# EAGLE board Arduino_Leonardo-PlusPlus (EAGLE 6.4)
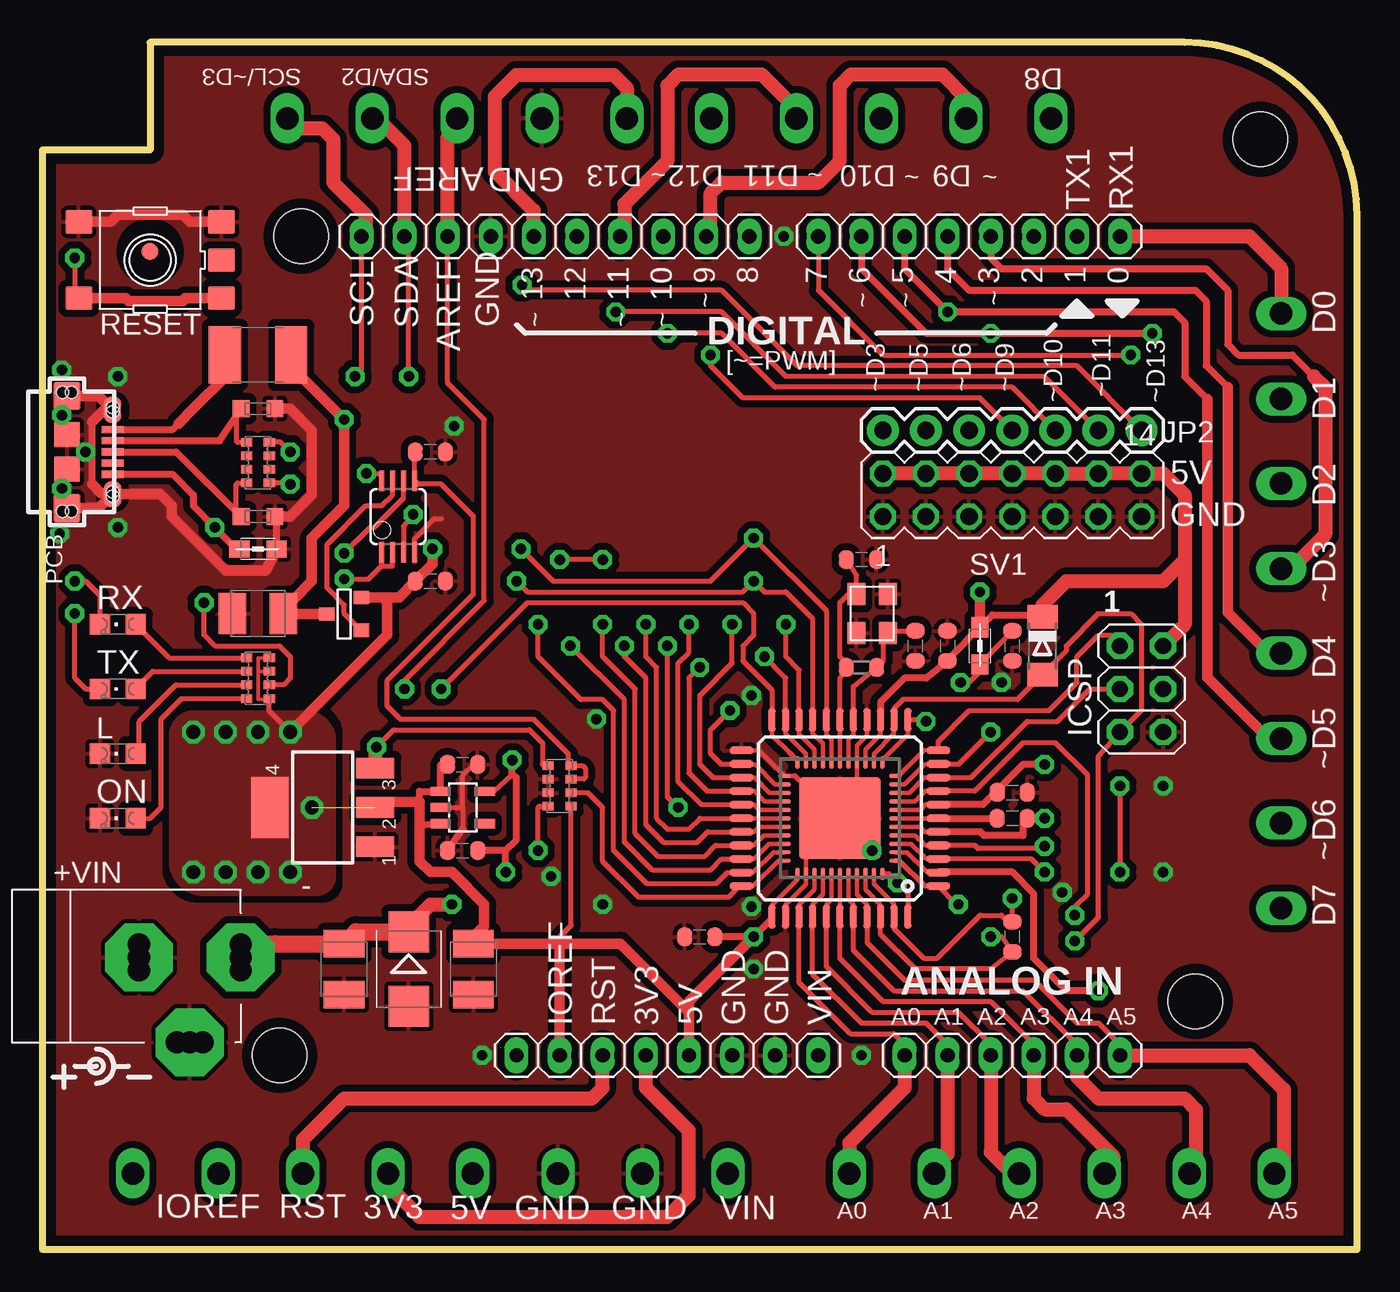
[diagram p0: board, top side]
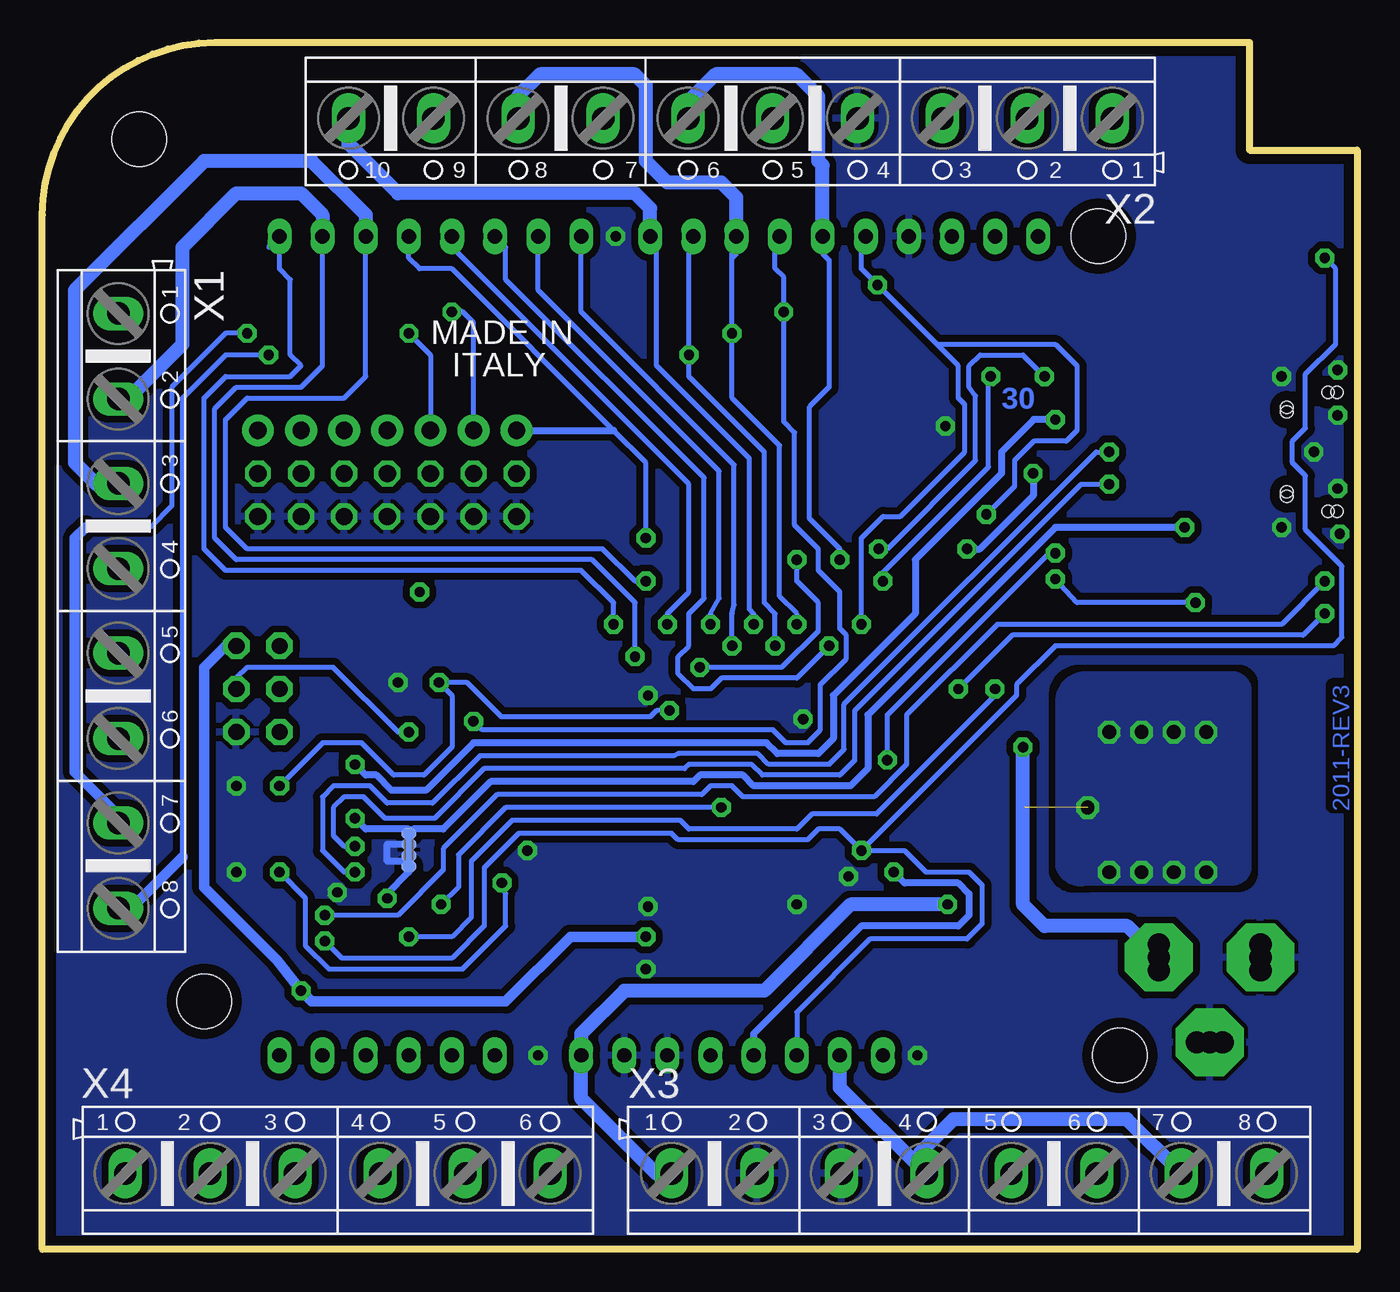
[diagram p1: board, bottom side, seen from below]

Size 77.47 x 71.12 mm. Coordinates in mm from the lower left corner, seen from the top.
Outline: 0,0 77.47,0 77.47,60.96 arc90 67.31,71.12 6.35,71.12 6.35,64.77 0,64.77 0,0
Copper layers (1*16): Top 0.035mm / dielectric 1.5mm / Bottom 0.035mm
Design rules "default *": minimum track width 10mil, minimum drill 10mil, track to track 6mil, track to pad 6mil, pad to pad 6mil, via to via 6mil, smd to smd 0mil, copper to edge 24mil, drill to drill 12mil, minimum pad ring 10mil, minimum via ring 10mil, stop-mask expansion 2mil, vias tented up to drill 30mil, thermal gap 10mil
Net classes: 0 default: width 0.254 mm, drill 0.61 mm, clearance 0.254 mm; 1 power: width 0.254 mm, drill 0.61 mm, clearance 0.254 mm; 2 gnd: width 0.254 mm, drill 0.61 mm, clearance 0.254 mm; 3 usbvcc: width 0.254 mm, drill 0.61 mm, clearance 0.254 mm; 4 aref: width 0.254 mm, drill 0.61 mm, clearance 0.254 mm
Holes 3.2 mm at 71.75,65.41 67.94,14.61 15.24,59.69 13.97,11.43
vRestrict: area 42.5,47.5 to 43.1,47.8; area 35.8,44.1 to 36.4,44.6; area 44.5,44.1 to 45.2,44.6; area 41.3,44.1 to 41.8,44.6; area 47.9,19.2 to 48.5,19.7; area 50.4,19.1 to 50.9,19.9

## Footprints (pad centres in the part's own frame; a part is rotated, then mirrored left to right if it is on the bottom)
C0603-ROUND = smd 0.898 x 1.1: 1 -0.889,0; 2 0.889,0
SMC_B = smd 1.6 x 2.4: + -1.5,0; - 1.5,0
SMB = smd 2.4 x 2.4: A 2.2,0; C -2.2,0
MINIMELF = smd 1.4 x 1.8: A 1.7,0; C -1.7,0
POWERSUPPLY_DC-21MM = drill 1.3 pad 4 octagon: 1 -5.08,-3.353; 2 -0.076,-6.35; 3 -0.076,-0.356 | drill 1.3: 4 -5.08,-4.115; 5 -5.08,-2.591; 6 -0.838,-0.356; 7 0.686,-0.356; 8 -0.838,-6.35; 9 0.686,-6.35
L1812 = smd 1.9 x 3.4: 1 -1.95,0; 2 1.95,0
FIDUCIA-MOUNT = smd 1.016 x 1.016: P$1 0,0
SOT223 = smd 1.219 x 2.235: 1 -2.311,-3.099; 2 0,-3.099; 3 2.311,-3.099 | smd 3.6 x 2.2: 4 0,3.099
MSOP08 = smd 0.3 x 1.2: 1 -0.976,-2.113; 2 -0.326,-2.113; 3 0.324,-2.113; 4 0.974,-2.113; 5 0.974,2.112; 6 0.324,2.112; 7 -0.326,2.112; 8 -0.976,2.112
2X03 = drill 0.95 pad 1.55 octagon: 1 -2.54,-1.27; 2 -2.54,1.27; 3 0,-1.27; 4 0,1.27; 5 2.54,-1.27; 6 2.54,1.27
CON2_USB_MICRO_B_AT = smd 0.406 x 1.346: P1 -1.321,2.692; P2 -0.66,2.692; P3 0,2.692; P4 0.66,2.692; P5 1.321,2.692 | smd 1.651 x 1.549: S1 -3.302,0; S2 3.302,0 | smd 1.524 x 1.016: S3 -2.489,2.692; S4 2.489,2.692 | smd 1.524 x 1.524: S5 -1.016,0; S6 1.016,0 | hole 0.7: -3.505,0.254; -3.505,-0.254; 3.505,0.254; 3.505,-0.254; -2.616,2.692; -2.362,2.692; 2.362,2.692; 2.616,2.692
1X08 = drill 0.85 pad 1.422 long: 1 -8.89,0; 2 -6.35,0; 3 -3.81,0; 4 -1.27,0; 5 1.27,0; 6 3.81,0; 7 6.35,0; 8 8.89,0
1X06 = drill 0.85 pad 1.422 long: 1 -6.35,0; 2 -3.81,0; 3 -1.27,0; 4 1.27,0; 5 3.81,0; 6 6.35,0
1X10 = drill 0.85 pad 1.422 long: 1 -11.43,0; 2 -8.89,0; 3 -6.35,0; 4 -3.81,0; 5 -1.27,0; 6 1.27,0; 7 3.81,0; 8 6.35,0; 9 8.89,0; 10 11.43,0
1X07 = drill 1.016 pad 1.88: 1 -7.62,0; 2 -5.08,0; 3 -2.54,0; 4 0,0; 5 2.54,0; 6 5.08,0; 7 7.62,0
CHIPLED_0805 = smd 1.2 x 1.2: A 0,-1.05; C 0,1.05
0805 = smd 1.2 x 1: 1 -1.1,0; 2 1.1,0
R0603-ROUND = smd 0.898 x 1.1: 1 -0.889,0; 2 0.889,0
R0402 = smd 0.7 x 0.9: 1 -0.65,0; 2 0.65,0
TS42 = smd 1.6 x 1.4: 1 -4.2,2.25; 2 4.2,2.25; 3 -4.2,-2.25; 4 4.2,-2.25; 5 -4.2,0
CAY16 = smd 0.5 x 0.65: 1 -1.2,-0.675; 2 -0.4,-0.675; 3 0.4,-0.675; 4 1.2,-0.675; 5 1.2,0.675; 6 0.4,0.675; 7 -0.4,0.675; 8 -1.2,0.675
MA07-2 = drill 1.016 octagon: 1 -7.62,-1.27; 2 -7.62,1.27; 3 -5.08,-1.27; 4 -5.08,1.27; 5 -2.54,-1.27; 6 -2.54,1.27; 7 0,-1.27; 8 0,1.27; 9 2.54,-1.27; 10 2.54,1.27; 11 5.08,-1.27; 12 5.08,1.27; 13 7.62,-1.27; 14 7.62,1.27
SOT-23 = smd 0.787 x 0.889: 1 0.025,-1.016; 2 -0.94,1.016; 3 0.991,1.016
QFN44ML7X7 = smd 0.75 x 0.275: 1 -3.275,2.5; 2 -3.275,2; 3 -3.275,1.5; 4 -3.275,1; 5 -3.275,0.5; 6 -3.275,0; 7 -3.275,-0.5; 8 -3.275,-1; 9 -3.275,-1.5; 10 -3.275,-2; 11 -3.275,-2.5; 23 3.275,-2.5; 24 3.275,-2; 25 3.275,-1.5; 26 3.275,-1; 27 3.275,-0.5; 28 3.275,0; 29 3.275,0.5; 30 3.275,1; 31 3.275,1.5; 32 3.275,2; 33 3.275,2.5 | smd 0.275 x 0.75: 12 -2.5,-3.275; 13 -2,-3.275; 14 -1.5,-3.275; 15 -1,-3.275; 16 -0.5,-3.275; 17 0,-3.275; 18 0.5,-3.275; 19 1,-3.275; 20 1.5,-3.275; 21 2,-3.275; 22 2.5,-3.275; 34 2.5,3.275; 35 2,3.275; 36 1.5,3.275; 37 1,3.275; 38 0.5,3.275; 39 0,3.275; 40 -0.5,3.275; 41 -1,3.275; 42 -1.5,3.275; 43 -2,3.275; 44 -2.5,3.275 | smd 4.826 x 4.826: EXP 0,0
TQFP44-PAD = smd 1.4 x 0.45: 1 -5.8,4; 2 -5.8,3.2; 3 -5.8,2.4; 4 -5.8,1.6; 5 -5.8,0.8; 6 -5.8,0; 7 -5.8,-0.8; 8 -5.8,-1.6; 9 -5.8,-2.4; 10 -5.8,-3.2; 11 -5.8,-4; 23 5.8,-4; 24 5.8,-3.2; 25 5.8,-2.4; 26 5.8,-1.6; 27 5.8,-0.8; 28 5.8,0; 29 5.8,0.8; 30 5.8,1.6; 31 5.8,2.4; 32 5.8,3.2; 33 5.8,4 | smd 0.45 x 1.4: 12 -4,-5.8; 13 -3.2,-5.8; 14 -2.4,-5.8; 15 -1.6,-5.8; 16 -0.8,-5.8; 17 0,-5.8; 18 0.8,-5.8; 19 1.6,-5.8; 20 2.4,-5.8; 21 3.2,-5.8; 22 4,-5.8; 34 4,5.8; 35 3.2,5.8; 36 2.4,5.8; 37 1.6,5.8; 38 0.8,5.8; 39 0,5.8; 40 -0.8,5.8; 41 -1.6,5.8; 42 -2.4,5.8; 43 -3.2,5.8; 44 -4,5.8 | smd 1 x 1: P$1 0,0
SOT23-DBV = smd 0.55 x 1.2: 1 -0.95,-1.3; 2 0,-1.3; 3 0.95,-1.3; 4 0.95,1.3; 5 -0.95,1.3
AK500/8 = drill 1.321 long: 1 -17.526,0; 2 -12.497,0; 3 -7.518,0; 4 -2.489,0; 5 2.489,0; 6 7.518,0; 7 12.497,0; 8 17.526,0
AK500/10 = drill 1.321 long: 1 -22.504,0; 2 -17.501,0; 3 -12.497,0; 4 -7.493,0; 5 -2.489,0; 6 2.489,0; 7 7.493,0; 8 12.497,0; 9 17.501,0; 10 22.504,0
AK500/6 = drill 1.321 long: 1 -12.522,0; 2 -7.518,0; 3 -2.515,0; 4 2.515,0; 5 7.518,0; 6 12.522,0
CRYSTAL-3.2-2.5 = smd 1.3 x 1.05: 1 -1.15,-0.925; 2 1.15,-0.925; 3 1.15,0.925; 4 -1.15,0.925
CT/CN0603 = smd 1 x 1: 1 -1,0; 2 1,0

## Placement (x,y rotation side)
C1  100n  [C0603-ROUND]  38.73,18.41 180 top
C2  100n  [C0603-ROUND]  53.34,35.56 90 top
C3  22p  [C0603-ROUND]  51.44,35.56 90 top
C4  22p  [C0603-ROUND]  48.26,40.64 0 top
C5  1uF  [C0603-ROUND]  57.15,35.56 270 top
C6  100n  [C0603-ROUND]  57.15,18.41 270 top
C7  1uF  [C0603-ROUND]  57.15,25.4 0 top
C8  10u  [SMC_B]  12.7,37.47 180 top
C9  100n  [C0603-ROUND]  57.15,26.92 180 top
C10  10u  [SMC_B]  17.78,16.51 270 top
C11  1u  [C0603-ROUND]  24.77,28.57 180 top
C12  10u  [SMC_B]  25.4,16.51 270 top
C13  100n  [C0603-ROUND]  22.86,39.37 0 top
C14  1u  [C0603-ROUND]  24.77,23.5 0 top
C22  100n  [C0603-ROUND]  22.86,46.99 180 top
D1  M7  [SMB]  21.59,16.51 270 top
D2  CD1206-S01575  [MINIMELF]  58.93,35.56 270 top
EXTPOWER  POWERSUPPLY_DC21MMX  [POWERSUPPLY_DC-21MM]  5.33,17.27 90 top
F1  MF-MSMF050-2 500mA  [L1812]  12.7,52.7 180 top
FID1  FIDUCIALMOUNT  [FIDUCIA-MOUNT]  6.35,58.8 0 top
IC1  NCP1117ST50T3G  [SOT223]  16.51,26.04 90 top
IC2  LMV358IDGKR  [MSOP08]  20.95,43.18 0 top
ICSP  ICSP  [2X03]  64.77,33.02 270 top
J1  USB MICRO  [CON2_USB_MICRO_B_AT]  1.45,46.99 270 top
J2  8x1F-H8.5  [1X08]  54.61,59.69 180 top
J3  8x1F-H8.5  [1X08]  36.83,11.43 0 top
J4  6x1F-H8.5  [1X06]  57.15,11.43 0 top
JP1  10x1F-H8.5  [1X10]  30.23,59.69 180 top
JP2  [1X07]  57.15,48.26 0 top
L  Yellow  [CHIPLED_0805]  4.45,29.21 90 top
L1  MH2029-300Y  [0805]  55.24,35.56 270 top
L2  MH2029-300Y  [0805]  12.7,41.27 0 top
ON  Green  [CHIPLED_0805]  4.45,25.4 90 top
R1  1M  [R0603-ROUND]  48.26,34.29 0 top
R2  NM  [R0402]  55.88,23.22 90 bottom
R3  NM  [R0402]  55.88,23.85 90 bottom
RESET  TS42  [TS42]  6.35,58.29 180 top
RN1  10K  [CAY16]  30.48,27.3 270 top
RN2  1K  [CAY16]  12.7,33.66 90 top
RN3  22R  [CAY16]  12.7,46.36 90 top
RX  Yellow  [CHIPLED_0805]  4.45,36.83 90 top
SV1  [MA07-2]  57.15,44.45 0 top
T1  FDN340P  [SOT-23]  17.78,37.47 270 top
TX  Yellow  [CHIPLED_0805]  4.45,33.02 90 top
U1  ATMEGA32U4-XUMU  [QFN44ML7X7]  46.99,25.4 180 top
U2  ATMEGA32U4-XUAU  [TQFP44-PAD]  46.99,25.4 180 top
U3  LP2985-33DBVR  [SOT23-DBV]  24.77,26.04 270 top
U$1  16HERTZ_BACK  [16HERTZ_BACK]  66.22,8.24 0 bottom
X1  [AK500/8]  73,37.62 270 bottom
X2  [AK500/10]  36.93,66.65 180 bottom
X3  [AK500/8]  22.86,4.47 0 bottom
X4  [AK500/6]  60.07,4.47 0 bottom
Y1  16MHz KX-7  [CRYSTAL-3.2-2.5]  48.9,37.47 270 top
Z1  CG0603MLC-05E  [CT/CN0603]  12.7,43.18 0 top
Z2  CG0603MLC-05E  [CT/CN0603]  12.7,49.53 0 top

## Library data of the parts
C1-C7 C9 C11 C13 C14 C22 EXTPOWER FID1 ICSP J1-J4 JP1 R1-R3 RESET U1-U3 Y1 = SmartPrj
C8 C10 C12 F1 = rcl
D1 D2 = diode
IC1 IC2 = linear
JP2 = SparkFun
L ON RX TX = led
L1 L2 = wuerth-elektronik
RN1-RN3 = resistor-dil; OC_FARNELL: unknown; OC_NEWARK: unknown
SV1 = con-lstb; OC_FARNELL: unknown; OC_NEWARK: unknown
T1 = zetex; OC_FARNELL: unknown; OC_NEWARK: unknown
U$1 = 16Hertz_back
X1-X4 = con-ptr500; OC_FARNELL: unknown; OC_NEWARK: unknown
Z1 Z2 = varistor

## Nets
5-GND: RESET.5
+3V3: C14.2 IC2.6 J3.4 U3.5 X3.5
+5V [usbvcc]: C1.1 C2.1 C11.2 C12.+ C13.1 D2.C IC1.2 IC1.4 IC2.8 ICSP.2 J3.2 J3.5 L1.1 RN1.5 RN2.1 RN2.3 RN2.4 SV1.2 SV1.4 SV1.6 SV1.8 SV1.10 SV1.12 SV1.14 T1.2 U1.2 U1.14 U1.34 U2.2 U2.14 U2.34 U3.1 U3.3 X3.4 X3.7
A0: J4.1 U1.36 U2.36 X4.6
A1: J4.2 U1.37 U2.37 X4.5
A2: J4.3 U1.38 U2.38 X4.4
A3: J4.4 U1.39 U2.39 X4.3
A4: J4.5 U1.40 U2.40 X4.2
A5: J4.6 U1.41 U2.41 X4.1
AGND: C6.1 R2.1 U1.43 U2.43
AREF [aref]: C6.2 JP1.8 U1.42 U2.42 X2.3
AVCC: C5.1 L1.2 U1.24 U1.44 U2.24 U2.44
CMP: C22.2 IC2.5 RN1.7 RN1.8
D0/RX: J2.1 U1.20 U2.20 X1.1
D1/TX: J2.2 U1.21 U2.21 X1.2
D2/SDA: J2.3 JP1.9 U1.19 U2.19 X1.3 X2.2
D3/SCL: J2.4 JP1.10 JP2.1 U1.18 U2.18 X1.4 X2.1
D4: J2.5 U1.25 U2.25 X1.5
D5*: J2.6 JP2.2 U1.31 U2.31 X1.6
D6*: J2.7 JP2.3 U1.27 U2.27 X1.7
D7: J2.8 U1.1 U2.1 X1.8
D+: J1.P3 RN3.8 Z1.1
D-: J1.P2 RN3.5 Z2.1
GATE_CMD: IC2.7 T1.3
GND [gnd]: C1.2 C2.2 C3.1 C4.2 C5.2 C8.- C9.1 C10.- C11.1 C12.- C13.2 C14.1 C22.1 D1.A EXTPOWER.1 EXTPOWER.3 IC1.1 IC2.4 ICSP.6 J1.S1 J1.S2 J1.S3 J1.S4 J1.S5 J1.S6 J3.6 J3.7 JP1.7 L2.2 L.C ON.C R2.2 R3.1 RESET.3 RESET.4 RN1.2 RN1.3 SV1.1 SV1.3 SV1.5 SV1.7 SV1.9 SV1.11 SV1.13 U1.15 U1.23 U1.35 U1.EXP U2.15 U2.23 U2.35 U2.P$1 U3.2 X2.4 X3.2 X3.3 Y1.2 Y1.4 Z1.2 Z2.2
HWB: RN1.6 U1.33 U2.33
IO8: JP1.1 U1.28 U2.28 X2.10
IO9*: JP1.2 JP2.4 U1.29 U2.29 X2.9
IO10*: JP1.3 JP2.5 U1.30 U2.30 X2.8
IO11*: JP1.4 JP2.6 U1.12 U2.12 X2.7
IO12: JP1.5 U1.26 U2.26 X2.6
IO13*: IC2.3 JP1.6 JP2.7 U1.32 U2.32 X2.5
LL: IC2.1 IC2.2 RN2.2
MISO: ICSP.1 U1.11 U2.11
MOSI: ICSP.4 U1.10 U2.10
N$2: L.A RN2.7
N$3: ON.A RN2.8
N$6: RN2.6 TX.A
N$8: RN2.5 RX.A
RD+: RN3.1 U1.4 U2.4
RD-: RN3.4 U1.3 U2.3
RESET: D2.A ICSP.5 J3.3 RESET.1 RESET.2 RN1.4 U1.13 U2.13 X3.6
RXLED: RX.C U1.8 U2.8
SCK: ICSP.3 U1.9 U2.9
TXLED: TX.C U1.22 U2.22
UCAP: C7.1 U1.6 U2.6
UGND [gnd]: C7.2 J1.P5 L2.1 R3.2 U1.5 U2.5
USBID: J1.P4
VIN [power]: C10.+ D1.C EXTPOWER.2 IC1.3 J3.8 RN1.1 X3.1
VUSB: C8.+ C9.2 F1.1 T1.1 U1.7 U2.7
XTAL1: C4.1 R1.1 U1.17 U2.17 Y1.1
XTAL2: C3.2 R1.2 U1.16 U2.16 Y1.3
XUSB [usbvcc]: F1.2 J1.P1

## Tracks (layer width: path | path; a pad name or v marks a point on that pad's centre or on a via)
+3V3  (via drill 0.61)
  Top 0.305: IC2.6 21.28,44.27 19.56,42.55 19.3,42.55 v17.78,41.02 | U3.5 26.6,26.98 27.69,27.94
  Top 0.406: 27.3,23.5 C14.2 | 27.3,23.5 27.94,24.13 27.94,27.81 27.69,27.94 v27.69,28.83 | v27.3,22.23 27.3,23.5
  Top 0.813: J3.4 35.56,9.53 38.1,6.99 38.1,3.18 36.83,1.91 22.23,1.91 20.37,3.76 X3.5
  Bottom 0.305: v17.78,41.02 17.91,41.02 18.03,40.89 18.29,40.89 27.69,31.5 v27.69,28.83
  Bottom 0.406: J3.4 35.56,12.7 29.21,19.05 23.5,19.05 22.86,19.69 22.86,20.95 23.5,21.59 26.67,21.59 v27.3,22.23
+5V  (via drill 0.61, 0.81)  (1 unrouted)
  Top 0.203: 12.7,34.05 12.7,32.39 13.3,32.39 | 12.7,34.05 RN2.3 | 12.7,34.05 12.7,34.86 RN2.4
  Top 0.254: U1.2 50.95,23.4 52.12,22.23 52.77,22.23 | U1.14 48.49,29.44 49.39,30.34 U2.14 | U1.34 44.49,21.78 42.99,20.28 U2.34
  Top 0.305: v14.61,30.48 13.38,31.71 RN2.1 13.3,32.39 | IC2.8 19.98,45.72 v19.09,45.72 | 52.77,22.23 U2.2 | RN1.5 31.16,19.09 30.48,18.41 30.48,18.01
  Top 0.406: 22.23,25.02 U3.3 | 22.23,26.36 22.23,26.98 U3.1 23.46,28.56 C11.2 | U2.14 49.39,32.25 50.8,33.66 52.09,33.66 C2.1 53.49,34.91 L1.1 55.97,37.39 58.75,37.39 58.8,37.34 D2.C | v62.23,15.24 60.33,15.24 58.42,17.15 58.42,20.95 57.15,22.23 52.77,22.23 | U2.34 42.99,19.5 v41.91,18.41 C1.1 | 25,18.01 C12.+
  Top 0.61: IC1.2 19.93,26.36 22.23,26.36 22.23,25.02 22.23,22.86 22.86,22.23 24.13,22.23 26.04,20.32 26.04,19.05 25,18.01 | 20.07,38.41 20.32,38.15 20.32,36.2 v14.61,30.48 | 20.07,38.41 T1.2 | C12.+ 30.48,18.01 | 38.1,13.97 34.06,18.01 30.48,18.01 | 38.1,13.97 J3.5 | 30.48,18.01 J3.2 | v55.24,38.73 L1.1 | 38.1,13.97 38.1,14.61 v41.91,18.41 | v22.99,41.27 22.99,40.39 C13.1 21.01,38.41 20.07,38.41 | 59.05,37.39 D2.C
  Top 0.813: 67.31,40.64 67.31,44.45 66.04,45.72 SV1.14 SV1.12 SV1.10 SV1.8 SV1.6 SV1.4 SV1.2 | 67.31,40.64 67.31,36.83 ICSP.2 | 67.31,40.64 66.04,39.37 60.33,39.37 58.93,37.97 D2.C
  Bottom 0.406: v22.99,41.27 22.23,41.27 19.05,44.45 19.05,45.43 v19.09,45.72
  Bottom 0.61: v41.91,18.41 46.35,18.41 50.16,14.61 61.59,14.61 v62.23,15.24 63.63,17.02 67.94,21.34 67.94,34.29 66.67,35.56 ICSP.2
  Bottom 0.813: 25.74,4.79 25.43,4.47 X3.4 | 25.74,4.79 30.48,9.53 J3.2 | X3.7 13.56,7.67 23.77,7.67 25.74,5.7 25.74,4.79
  other vias: 8.89,30.48 14.61,22.23 10.79,30.48 12.7,30.48 15.88,26.04 8.89,22.23 10.79,22.23 12.7,22.23
  pour Top (no thermals): 7.62,30.5 arc-90 9.26,31.62 15.51,31.62 arc-90 17.14,29.99 17.14,21.95 arc-90 16.14,20.95 9.89,20.95 arc-90 7.62,22.59
  pour Bottom (isolate 0.406, no thermals): 16.02,33.91 arc-90 17.65,32.27 17.65,22.59 arc-90 16.02,21.59 7.35,21.59 arc-90 6.35,22.59 6.35,32.91 arc-90 7.35,33.91
A0
  Top 0.254: U1.36 45.49,21.21 44.59,20.31 U2.36
  Top 0.305: U2.36 44.59,15.73 47.62,12.7 50.16,12.7 50.8,12.07 J4.1
  Top 0.813: J4.1 50.8,9.53 47.55,6.27 X4.6
A1
  Top 0.254: U2.37 45.39,20.32 45.99,20.92 U1.37
  Top 0.305: U2.37 45.39,16.21 48.26,13.34 52.07,13.34 53.34,12.07 J4.2
  Top 0.813: J4.2 53.34,5.61 52.55,4.83 X4.5
A2
  Top 0.254: U1.38 46.49,20.63 46.19,20.33 U2.38
  Top 0.305: U2.38 46.19,16.68 48.9,13.97 53.98,13.97 55.88,12.07 J4.3
  Top 0.813: J4.3 55.88,5.72 57.12,4.47 X4.4
A3
  Top 0.254: U2.39 U1.39
  Top 0.305: U2.39 46.99,17.15 49.53,14.61 55.88,14.61 58.42,12.07 J4.4
  Top 0.813: J4.4 58.42,8.89 59.05,8.26 60.33,8.26 63.09,5.49 63.09,4.93 62.64,4.47 X4.3
A4
  Top 0.254: U1.40 47.49,20.63 47.79,20.33 U2.40
  Top 0.305: U2.40 47.79,17.62 50.16,15.24 57.78,15.24 60.96,12.07 J4.5
  Top 0.813: J4.5 60.96,10.16 62.23,8.89 67.31,8.89 67.97,8.23 67.97,4.93 67.59,4.55 X4.2
A5
  Top 0.254: U1.41 47.99,20.92 48.59,20.32 U2.41
  Top 0.305: U2.41 48.59,18.09 50.8,15.88 58.42,15.88 60.96,13.34 62.23,13.34 63.5,12.07 J4.6
  Top 0.813: J4.6 71.12,11.43 73.15,9.4 73.15,5.23 72.59,4.67 X4.1
AGND  (via drill 0.61)
  Top 0.254: U1.43 48.99,21.55 50.19,20.35 U2.43
  Top 0.305: U2.43 50.19,18.9 51.94,17.15 52.7,17.15 55.24,19.69 56.52,19.69 57.13,19.05 C6.1 v57.15,20.68
  Bottom 0.406: v57.15,20.68 57.15,20.95 55.88,22.23 R2.1
AREF  (via drill 0.61)
  Top 0.254: U1.42 48.49,21.21 49.39,20.31 U2.42
  Top 0.305: U2.42 49.39,18.55 51.44,16.51 55.9,16.51 C6.2 56.53,18.41 v55.88,18.41 | JP1.8 23.88,51.05 26.04,48.9 26.04,38.23 21.34,33.53 v21.34,33.02
  Top 0.813: JP1.8 23.88,65.58 24.43,66.14 X2.3
  Bottom 0.305: v21.34,33.02 21.34,32.64 28.32,25.65 32.13,25.65 33.02,24.77 39.37,24.77 39.88,25.27 49.78,25.27 52.2,22.86 52.2,19.56 53.34,18.41 v55.88,18.41
AVCC  (via drill 0.61)
  Top 0.254: U2.24 41.22,28.57 42.01,28.57 43.18,27.41 43.57,27.41 U1.24
  Top 0.305: U2.44 50.99,20.99 v50.39,21.59 49.91,22.12 U1.44 | U2.24 39.98,28.6 39.37,29.21 39.37,30.61 v40.51,31.75 | v54.1,33.4 54.61,33.4 55.24,34.04 L1.2 55.7,34.91 C5.1 | v63.5,27.3 v63.5,22.23
  Bottom 0.305: v50.39,21.59 50.16,20.95 50.16,19.05 52.7,16.51 60.58,16.51 61.98,17.91 61.98,20.7 v63.5,22.23 | v63.5,27.3 60.96,29.84 58.67,29.84 56.77,27.94 54.99,27.94 53.34,29.59 53.34,32.64 v54.1,33.4 52.45,33.4 50.42,31.37 41.66,31.37 41.27,31.75 v40.51,31.75
CMP
  Top 0.305: RN1.8 31.05,28.5 | RN1.8 30.99,28.67 30.99,29.21 28.96,31.24 21.08,31.24 20.32,32 20.32,33.53 25.4,38.61 25.4,43.18 23.5,45.09 22.14,45.09 IC2.5 21.93,46.82 21.97,46.86 C22.2 | RN1.8 31.82,28.5 32,28.32 32,27.81 31.9,27.71 RN1.7
D0/RX  (via drill 0.61)
  Top 0.254: U1.20 45.49,29.46 44.59,30.37 U2.20
  Top 0.305: U2.20 44.59,34.15 43.81,34.92 v43.81,36.83
  Top 0.813: J2.1 71.12,59.69 73,57.81 X1.1
  Bottom 0.305: v43.81,36.83 43.81,38.1 45.72,40 66.67,40 67.94,41.27 67.94,50.16 66.67,51.44 62.87,51.44 62.23,52.07 62.87,52.7 62.87,57.15 63.5,57.79 J2.1 64.14,59.05
D1/TX  (via drill 0.61)
  Top 0.254: U1.21 44.99,29.2 43.79,30.4 U2.21
  Top 0.305: U2.21 43.79,33.68 v42.55,34.92
  Bottom 0.305: v42.55,34.92 42.55,38.1 45.09,40.64 66.04,40.64 67.31,41.91 67.31,49.53 66.04,50.8 62.23,50.8 60.96,52.07 J2.2 60.96,58.42
  Bottom 0.813: J2.2 60.96,60.96 62.23,62.23 66.04,62.23 69.22,59.05 69.22,53.34 72.44,50.11 X1.2
D2/SDA  (via drill 0.61)
  Top 0.254: U1.19 45.99,29.8 45.39,30.4 U2.19
  Top 0.305: U2.19 45.39,37.16 43.81,38.73 42.55,38.73 v41.91,39.37 41.27,38.73 28.57,38.73 v27.94,39.37 | JP1.9 21.59,59.44 v21.59,51.44
  Top 0.406: JP1.9 21.34,60.58
  Top 0.813: 21.34,60.58 21.34,65.02 19.71,66.65 X2.2
  Bottom 0.305: v21.59,51.44 21.59,51.31 21.72,51.18 21.72,46.1 27.94,39.88 v27.94,39.37 | v41.91,39.37 42.55,39.37 44.45,41.27 65.41,41.27 66.67,42.55 66.67,48.9 65.41,50.16 59.69,50.16 58.42,51.44 J2.3
  Bottom 0.813: J2.3 58.42,60.96 61.59,64.13 67.94,64.13 75.56,56.52 75.56,46.36 74.3,45.09 74.24,45.14 X1.3
D3/SCL  (via drill 0.61)
  Top 0.254: U1.18 46.49,30.04 46.19,30.34 U2.18
  Top 0.305: v18.41,51.44 18.8,51.82 JP1.10 | v28.19,41.27 30.1,39.37 39.37,39.37 v41.91,41.91 46.19,37.63 U2.18
  Top 0.406: J2.4 55.88,58.42 56.52,57.79 68.58,57.79 69.85,56.52 69.85,53.34 70.48,52.7 73.66,52.7 74.93,51.44
  Top 0.813: JP1.10 19.05,59.94 19.05,60.96 17.14,62.87 17.14,65.41 16.51,66.04 14.43,66.04 X2.1 | 74.93,51.44 75.59,50.77 75.59,42.11 73.58,40.11 X1.4
  Bottom 0.305: v18.41,51.44 19.68,52.7 22.23,52.7 22.86,52.07 22.86,50.8 22.48,50.29 22.48,46.48 27.69,41.27 v28.19,41.27 | v41.91,41.91 41.91,46.36 43.81,48.26 53.34,57.79 55.24,57.79 55.88,58.42 J2.4
  Bottom 0.406: JP2.1 43.81,48.26
D4  (via drill 0.61)
  Top 0.254: U2.25 41.95,27.8 42.85,26.9 U1.25
  Top 0.305: U2.25 39.51,27.8 38.73,28.57 38.73,32.64 40.64,34.54 v40.64,36.83
  Top 0.406: J2.5 53.34,57.79 54.61,56.52 67.94,56.52 68.58,55.88 68.58,52.07 69.85,50.8
  Top 0.61: 69.85,50.8 69.85,37.52 72.24,35.13 X1.5
  Bottom 0.305: J2.5 53.34,59.05 39.37,45.09 39.37,38.73 40.64,37.47 v40.64,36.83
D5*  (via drill 0.6, 0.61)
  Top 0.254: U1.31 42.82,23.9 41.92,23 U2.31
  Top 0.305: U2.31 40.02,23 39.38,22.37 35.93,22.37 34.29,24 34.29,32.39 v31.11,35.56
  Top 0.406: J2.6 50.8,57.79 v53.34,55.24 66.67,55.24 67.31,54.61 67.31,51.44 68.63,50.11
  Top 0.61: 68.63,50.11 68.63,33.71 72.24,30.1 X1.6
  Bottom 0.305: J2.6 50.16,59.05 50.16,57.15 38.48,45.47 38.48,38.35 39.37,37.47 39.37,35.56 40.01,34.92 40.01,33.91 39.12,33.02 38.1,33.02 37.47,33.66 33.02,33.66 v31.11,35.56 | JP2.2 52.07,54.61 52.7,55.24 v53.34,55.24
D6*  (via drill 0.6, 0.61)
  Top 0.254: U2.27 41.92,26.2 42.22,25.9 U1.27
  Top 0.305: U2.27 38.82,26.2 37.47,27.56 37.47,34.54 38.1,35.18 v38.1,36.83
  Top 0.406: J2.7 48.26,57.79 52.07,53.98 v55.88,53.98 v65.41,53.98
  Bottom 0.305: J2.7 48.26,56.52 37.59,45.85 37.59,38.35 38.1,37.47 v38.1,36.83 | 74.93,42.55 71.12,42.55 69.85,43.81 69.85,50.8 66.67,53.98 v65.41,53.98 | v55.88,53.98 54.61,52.7 JP2.3
  Bottom 0.61: 74.93,42.55 75.56,41.91 75.56,28.14 73,25.58 X1.7
D7  (via drill 0.6, 0.61)
  Top 0.305: U1.1 50.51,22.9 52.01,21.4 U2.1 53.87,20.32 v53.98,20.32 | v37.47,26.04 36.83,26.67 v36.83,35.56 | J2.8 45.72,56.52 49.53,52.7 v64.14,52.7
  Bottom 0.305: J2.8 45.72,55.24 36.7,46.23 36.7,37.97 36.83,37.47 v36.83,35.56 | v37.47,26.04 50.16,26.04 52.96,23.24 52.96,21.34 v53.98,20.32 | 69.22,23.11 69.22,50.16 66.67,52.7 v64.14,52.7
  Bottom 0.61: 69.22,23.11 72.24,20.09 X1.8
D+
  Top 0.305: RN3.8 11.5,45.16 11.43,45.09 11.43,43.55 Z1.1
  Top 0.406: J1.P3 7.87,46.99 9.78,45.09 9.79,45.09 Z1.1
D-
  Top 0.305: RN3.5 11.5,47.55 11.43,47.62 11.43,49.16 Z2.1
  Top 0.406: Z2.1 10.46,47.65 J1.P2
GATE_CMD
  Top 0.305: IC2.7 20.63,44.45 19.99,43.81 19.05,43.81 16.76,41.53 16.76,38.99 17.78,37.97 17.78,37.47 18.77,36.47 T1.3
GND  (via drill 0.61, 0.61 pad 1.02)
  Top 0.254: U1.23 42.22,29.4 U2.23
  Top 0.279: U2.15 48.59,30.28 47.99,29.68 U1.15 47.99,26.4 | 44.99,23.4 U1.35 44.99,21.5 43.79,20.3 U2.35 | 44.34,27.9 U1.23
  Top 0.305: U2.P$1 47.99,26.4 | 44.99,23.4 U2.P$1 | 44.34,27.9 44.6,27.64 44.76,27.64 U2.P$1 | U2.P$1 v48.9,23.5 | IC2.4 21.93,41.87 23.11,43.05 23.5,43.05 | J1.S4 4.06,44.58 | 51.56,34.67 C3.1 | U3.2 24.77,26.04 | 24.77,26.04 24.77,24.78 | 24.77,26.04 24.77,27.94 25.4,28.57 C11.1
  Top 0.406: C14.1 24.77,24.78 | L2.2 13.8,43.08 Z1.2 | 2.92,45.09 2.92,48.77
  Top 0.61: RESET.4 4.03,60.54 4.45,60.96 8.26,60.96 8.67,60.54 RESET.3 | L2.2 13.16,40 10.79,40 7.62,43.18 7.62,43.81 6.93,44.5 J1.S4 3.33,43.69 J1.S2 | Z2.2 14.61,49.53 15.88,48.26 15.88,44.45 14.61,43.18 Z1.2 | J1.S1 3.33,50.29 J1.S3 3.63,49.48 2.92,48.77 | 2.92,45.09 3.43,44.58 4.06,44.58
  Bottom 0.406: R3.1 R2.2 57.15,23.87 57.15,22.86 55.88,22.86 R3.1
  other vias: 41.78,20.19 60.1,21.03 41.78,32.64 56.52,33.4 24.26,48.51 33.02,20.32 29.97,21.97 41.91,16.51 66.04,22.23 66.04,27.3 48.26,11.43 43.69,59.69 32.64,31.24 4.45,51.44 4.45,42.55 25.91,11.43 1.14,49.15 1.14,44.83 2.54,46.99 1.14,51.82 1.02,42.16
  pour Top (isolate 0.406, rank 2): -1.27,69.22 -1.27,-2.54 79.38,-2.54 79.38,72.39 79.38,74.93 -1.27,74.93
  pour Bottom (isolate 0.406, rank 2): -2.54,-4.45 78.11,-4.45 78.11,70.48 78.11,73.03 -2.54,73.03
HWB
  Top 0.254: U1.33 43.37,22.9 41.87,21.4 U2.33
  Top 0.305: U2.33 41.09,21.4 40.64,20.95 40.45,20.77 35.12,20.77 33.02,22.86 33.02,26.04 32.15,26.91 RN1.6
IO8  (via drill 0.61)
  Top 0.254: U2.28 U1.28
  Top 0.305: U2.28 38.73,25.4 38.1,24.77 36.83,24.77 36.2,25.4 36.2,34.29 35.56,34.92 v35.56,36.83
  Bottom 0.305: v35.56,36.83 35.56,37.47 35.81,37.72 35.81,46.61 41.27,52.07 41.27,59.31 JP1.1
  Bottom 0.813: JP1.1 41.66,61.34 42.55,62.23 56.52,62.23 59.44,65.15 X2.10
IO9*  (via drill 0.6, 0.61)  (1 unrouted)
  Top 0.254: U2.29 41.92,24.6 42.22,24.9 U1.29
  Top 0.305: U2.29 39.2,24.6 38.57,23.96 36.61,23.96 35.56,25.02 35.56,33.66 34.29,34.92 v34.29,35.56 | JP2.4 55.24,50.16 41.27,50.16 39.37,52.07 v39.37,52.7
  Top 0.813: 39.37,59.44 39.37,62.23 40.01,62.87 45.72,62.87 46.99,64.13 46.99,68.58 47.65,69.24 53.03,69.24 54.43,67.84 X2.9
  Bottom 0.305: v34.29,35.56 34.29,37.47 34.92,38.1 34.92,46.99 39.37,51.44 v39.37,52.7 39.37,59.44 JP1.2
IO10*  (via drill 0.6, 0.61)
  Top 0.254: U1.30 42.51,24.4 41.91,23.8 U2.30
  Top 0.305: U2.30 39.67,23.8 39.04,23.16 36.27,23.16 34.92,24.51 34.92,33.02 33.02,34.92 v33.02,36.83 | JP2.5 57.15,50.8 43.18,50.8 40.01,53.98 v36.83,53.98
  Bottom 0.305: 36.58,59.05 36.58,58.67 36.83,58.42 | 36.58,59.05 JP1.3 | v33.02,36.83 33.02,37.47 34.04,38.48 34.04,47.37 36.83,50.16 v36.83,53.98 36.83,58.8 36.58,59.05
  Bottom 0.813: JP1.3 36.58,61.98 37.47,62.87 40.64,62.87 41.91,64.13 41.91,68.58 42.57,69.24 48.16,69.24 49.43,67.97 X2.8
IO11*  (via drill 0.6, 0.61)
  Top 0.254: U1.12 49.49,28.84 50.99,30.34 U2.12
  Top 0.305: U2.12 52.16,31.2 v52.07,31.12 | JP2.6 59.05,51.44 43.81,51.44 40.01,55.24 v33.78,55.24
  Top 0.813: JP1.4 34.29,59.94 34.29,61.59 36.83,64.13 36.83,68.58 37.49,69.24 42.37,69.24 44.42,67.18 X2.7
  Bottom 0.305: v52.07,31.12 51.56,30.61 34.42,30.61 33.66,29.84 32.38,29.84 31.62,30.61 31.62,33.27 30.1,34.8 30.1,36.2 30.48,36.58 30.48,38.73 31.75,40 31.75,41.27 33.15,42.67 33.15,48.13 33.78,48.77 v33.78,55.24 33.78,57.28 34.29,57.79 34.29,59.44
  Bottom 0.406: 34.29,59.44 JP1.4
IO12  (via drill 0.61)
  Top 0.254: U1.26 42.56,26.4 41.96,27 U2.26
  Top 0.305: U2.26 39.17,27 38.1,28.07 38.1,33.66 v38.73,34.29 | v33.02,40.64 v30.48,40.64
  Bottom 0.305: v38.73,34.29 33.91,34.29 31.75,36.45 31.75,38.1 33.02,39.37 v33.02,40.64 | JP1.5 31.5,58.67 31.11,58.29 31.11,50.8 32.26,49.66 32.26,43.05 30.48,41.27 v30.48,40.64
  Bottom 0.813: JP1.5 31.5,63.88 31.75,64.13 31.75,67.94 33.05,69.24 37.8,69.24 39.62,67.41 39.42,67.21 X2.6
IO13*  (via drill 0.6, 0.61)
  Top 0.254: U1.32 43.09,23.4 41.88,22.2 U2.32
  Top 0.305: U2.32 40.36,22.2 39.73,21.57 35.59,21.57 33.66,23.5 33.66,31.75 33.02,32.39 31.75,32.39 29.21,34.92 v29.21,36.83 | IC2.3 21.28,42.62 v21.84,43.31 | JP2.7 60.96,52.07 44.45,52.07 40.01,56.52 28.57,56.52 v28.26,56.83
  Top 0.813: JP1.6 28.96,61.21 26.67,63.5 26.67,67.94 27.94,69.22 33.66,69.22 34.44,68.43 X2.5
  Bottom 0.305: JP1.6 29.21,59.44 29.21,57.79 v28.26,56.83 24.77,53.34 | v21.84,43.31 20.19,44.96 20.19,46.48 19.05,47.62 17.14,47.62 16.51,48.26 16.51,52.07 17.78,53.34 24.77,53.34 | v29.21,36.83 29.21,41.91 27.94,43.18 26.92,43.18 23.11,46.99 23.11,49.78 23.5,50.16 23.5,52.07 24.77,53.34
LL  (via drill 0.61)
  Top 0.305: IC2.2 20.63,40.26 19.98,40.26 | 19.98,40.26 IC2.1 | v17.78,39.5 19.22,39.5 19.98,40.26 | RN2.2 14.21,33.25 14.61,33.66 14.61,34.92 13.97,35.56 10.16,35.56 9.53,36.2 v9.53,38.1
  Bottom 0.305: v17.78,39.5 16.51,38.1 v9.53,38.1
MISO
  Top 0.254: U1.11 50.45,27.9 51.97,29.41 U2.11
  Top 0.305: U2.11 52.79,29.93 54.61,31.75 59.31,31.75 60.96,33.4 60.96,34.92 62.23,36.2 62.99,36.2 63.5,35.69 ICSP.1
MOSI  (via drill 0.61)
  Top 0.254: U1.10 50.79,27.4 51.97,28.57 U2.10
  Top 0.305: U2.10 54,28.6 v55.88,30.48
  Bottom 0.305: v55.88,30.48 56.52,30.48 60.33,34.29 65.41,34.29 66.04,33.66 ICSP.4
N$2
  Top 0.305: RN2.7 7.86,33.25 5.71,31.12 5.71,29.21 L.A
N$3
  Top 0.305: RN2.8 8.2,32.45 6.99,31.24 6.99,26.04 6.35,25.4 ON.A
N$6
  Top 0.305: RN2.6 6.5,34.05 5.5,33.05 TX.A
N$8
  Top 0.305: RN2.5 7.47,34.86 RX.A
RD+  (via drill 0.61)
  Top 0.254: U2.4 52.02,23.8 51.42,24.4 U1.4
  Top 0.305: RN3.1 14.54,45.16 v14.61,45.09 | 58.98,23.67 v59.05,23.75 58.93,23.62 55.12,23.62 54.94,23.8 U2.4
  Bottom 0.305: v14.61,45.09 16.26,45.09 29.59,31.75 29.59,28.83 30.48,27.94 35.05,27.94 35.69,28.57 39.37,28.57 39.62,28.32 51.44,28.32 54.36,25.4 57.28,25.4 58.55,26.67 59.69,26.67 60.33,26.04 60.33,24.38 59.69,23.75 v59.05,23.75
RD-  (via drill 0.61)
  Top 0.254: U1.3 51.18,23.9 52.08,23 U2.3
  Top 0.305: RN3.4 14.04,47.55 v14.61,46.99 | v59.05,22.23 58.28,23 U2.3
  Bottom 0.305: v14.61,46.99 15.37,46.99 30.23,32.13 30.23,29.46 31.11,28.57 34.67,28.57 35.31,29.21 40.01,29.21 40.26,29.08 51.69,29.08 54.48,26.29 57.15,26.29 58.17,27.3 60.33,27.3 60.96,26.67 60.96,23.5 59.69,22.23 v59.05,22.23
RESET  (via drill 0.61)
  Top 0.254: U1.13 48.99,29.2 50.19,30.4 U2.13
  Top 0.305: v1.91,58.42 1.91,56.8 RESET.2 | v60.83,18.16 62.23,19.56 62.23,29.08 ICSP.5 64.77,31.75 64.77,36.83 64.14,37.47 62.23,37.47 60.33,35.56 60.33,35.26 D2.A 57.45,32.39 50.7,32.39 50.19,31.88 U2.13 | RN1.4 29.28,26.11 29.21,26.04 v29.21,23.5
  Top 0.61: RESET.2 4.92,56.04 5.08,55.88 8.26,55.88 8.42,56.04 RESET.1
  Top 0.813: J3.3 33.02,9.53 32.38,8.89 17.78,8.89 15.34,6.45 X3.6
  Bottom 0.305: J3.3 33.02,13.97 28.7,18.29 22.99,18.29 22.1,19.18 22.1,21.46 22.86,22.23 25.4,22.23 26.67,23.5 v29.21,23.5 | v1.91,58.42 1.27,57.79 1.27,53.34 3.05,51.56 3.05,48.39 3.81,47.62 3.81,46.36 3.05,45.59 3.05,42.42 0.89,40.26 0.89,36.07 1.4,35.56 17.78,35.56 20.07,33.27 20.07,32.64 v29.21,23.5 | v29.21,23.5 30.48,24.77 31.75,24.77 32.38,24.13 40.01,24.13 40.39,24.51 49.4,24.51 51.44,22.48 51.44,19.05 53.34,17.15 59.82,17.15 v60.83,18.16
RXLED  (via drill 0.61)
  Top 0.254: U1.8 51.42,26.4 52.02,27 U2.8
  Top 0.305: v1.91,39.37 2.54,39.37 3.4,38.52 RX.C | U2.8 54.94,27 57.78,29.84 59.69,29.84 61.59,27.94 61.59,20.95 60.83,20.19 v60.83,19.69
  Bottom 0.305: v1.91,39.37 4.45,36.83 21.21,36.83 26.54,31.5 26.54,28.57 28.45,26.67 36.2,26.67 36.83,27.3 38.1,27.3 38.61,26.8 50.67,26.8 53.85,23.62 53.85,22.35 56.52,19.69 v60.83,19.69
SCK
  Top 0.254: U1.9 51.08,26.9 51.98,27.8 U2.9
  Top 0.305: U2.9 54.72,27.8 58.04,31.12 59.82,31.12 61.72,33.02 ICSP.3
TXLED  (via drill 0.61)
  Top 0.254: 44.49,28.79 U1.22
  Top 0.279: U2.22 42.99,30.29 44.04,29.23 44.49,28.79
  Top 0.305: v1.91,37.47 1.91,33.66 2.54,33.02 TX.C | 44.04,29.23 44.19,29.09 | U2.22 42.99,32.96 41.27,34.67 41.27,35.56 41.91,36.2 41.91,37.47 41.27,38.1 28.57,38.1 v23.5,33.02
  Bottom 0.305: v1.91,37.47 3.17,36.2 20.32,36.2 v23.5,33.02
UCAP
  Top 0.254: U1.6 U2.6
  Top 0.406: U2.6 C7.1
UGND  (via drill 0.61)
  Top 0.254: U2.5 52.01,24.6 51.71,24.9 U1.5
  Top 0.406: L2.1 11.43,41.27 v10.16,42.55 8.89,43.81 8.89,44.45 7.67,45.67 J1.P5 | v59.05,25.4 C7.2 57.78,25.39 57.78,24.38 55.5,24.38 55.28,24.6 U2.5
  Bottom 0.406: v10.16,42.55 17.78,42.55 28.83,31.5 28.83,28.32 29.84,27.3 35.56,27.3 36.2,27.94 38.73,27.94 39.12,27.56 51.05,27.56 53.85,24.77 55.62,24.77 R3.2 55.88,24.77 58.42,24.77 v59.05,25.4
VIN  (via drill 0.61)
  Top 0.305: RN1.1 29.53,28.5 29.46,28.57 29.46,29.84 28.7,30.61 20.7,30.61 v19.68,29.59
  Top 0.406: v19.68,29.59 19.68,28.42 IC1.3
  Top 0.813: IC1.3 19.61,29.77 v19.68,29.59 | v24.13,20.32 22.86,20.32 21.59,19.05 D1.C
  Top 1.016: EXTPOWER.2 12.48,18 13.74,18.01 C10.+ | C10.+ 17.21,18.01 | D1.C 18.48,18.71 C10.+
  Bottom 0.813: v19.68,29.59 19.68,20.32 18.41,19.05 13.54,19.05 EXTPOWER.2 | v24.13,20.32 29.84,20.32 34.92,15.24 43.18,15.24 45.72,12.7 J3.8 45.72,8.89 41.3,4.47 X3.1
VUSB  (via drill 0.61)
  Top 0.254: U1.7 51.73,25.9 52.03,26.2 U2.7
  Top 0.305: 56.52,26.69 C9.2
  Top 0.406: 56.52,27.3 56.52,26.69 | 56.52,27.3 57.78,28.57 v59.05,28.57 | U2.7 55.41,26.2 56.52,27.3 | 56.52,27.3 C9.2
  Top 0.61: F1.1 15.29,51.39 v17.78,48.9 17.78,43.81 15.88,41.91 15.88,39.37 14.84,38.33 C8.+ 14.86,37.44 T1.1
  Bottom 0.406: v59.05,28.57 58.42,27.94 57.78,27.94 56.9,27.05 54.86,27.05 52.07,29.84 34.8,29.84 34.16,29.21 31.75,29.21 30.86,30.1 30.86,32.64 26.04,37.47 26.04,40.64 20.95,45.72 20.95,46.99 19.05,48.9 v17.78,48.9
XTAL1
  Top 0.254: U1.17 U2.17
  Top 0.305: U2.17 46.99,33.64 R1.1 47.62,34.29 46.99,34.92 46.99,38.1 47.51,38.62 Y1.1 47.97,39.73 C4.1
XTAL2
  Top 0.254: U1.16 47.49,30.04 47.79,30.34 U2.16
  Top 0.305: U2.16 47.79,33.17 R1.2 49.55,34.69 49.55,36.04 Y1.3 49.82,36.45 C3.2
XUSB
  Top 0.406: J1.P1 7.67,48.31 8.89,49.53
  Top 0.61: 8.03,48.67 8.89,49.53 10.79,51.44 10.79,52.12 F1.2

## Text on the board
Bottom: 30 | 2011-REV3
tPlace: SCL/~D3 | SDA/D2 | D8 | D13 | D12 | D11 | D10 | D9 | 13 | 12 | 11 | 11 | 10 | 10 | 9 | 8 | 7 | 6 | 5 | 4 | 3 | 2 | 1 | 0 | D0 | D1 | 5V | D2 | ~D3 | D4 | ~D5 | ~D6 | +VIN | - | D7
tNames: AREF | GND | ~ | ~ | ~ | ~ | TX1 | RX1 | ~ | ~ | ~ | ~ | SCL | SDA | GND | ~ | ~ | ~ | AREF | DIGITAL | [~=PWM] | ~D3 | ~D5 | ~D6 | ~D9 | ~D10 | ~D11 | ~D13 | GND | 1 | ANALOG IN | IOREF | RST | 3V3 | 5V | GND | GND | VIN | A0 | A1 | A2 | A3 | A4 | A5 | IOREF | RST | 3V3 | 5V | GND | GND | VIN | A0 | A1 | A2 | A3 | A4 | A5
bNames: MADE IN | ITALY
ReferenceLC: X2
201bmp: E:/FREELANCE/Clients/Odesk_Arun/Trunk/LOGO/LOGOforLeonardo-mono.bmp | E:/FREELANCE/Clients/Odesk_Arun/Trunk/LOGO/leonardo-mono.bmp